# EAGLE board LPS22HB_pcb (EAGLE 8.2.2)
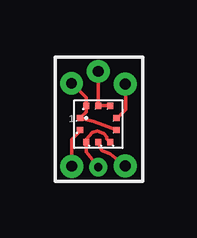
[diagram p0: board, top side]
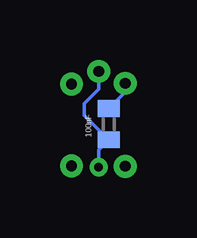
[diagram p1: board, bottom side, seen from below]

No outline drawn. Coordinates in mm, seen from the top.
Copper layers (1*16): Top 0.035mm / dielectric 1.5mm / Bottom 0.035mm
Design rules "default": minimum track width 6mil, minimum drill 0.35mm, track to track 6mil, track to pad 6mil, pad to pad 6mil, via to via 6mil, smd to smd 6mil, copper to edge 40mil, drill to drill 6mil, minimum pad ring 10mil, minimum via ring 8mil, stop-mask expansion 4mil, vias tented up to drill 0mil, thermal gap 10mil

## Footprints (pad centres in the part's own frame; a part is rotated, then mirrored left to right if it is on the bottom)
C0402 = smd 0.7 x 0.9: 1 -0.65,0; 2 0.65,0
LPS22HB_HLGA = smd 0.275 x 0.25: P$1 0.762,-0.25; P$2 0.762,0.25; P$6 -0.762,0.25; P$7 -0.762,-0.25 | smd 0.25 x 0.275: P$3 0.5,0.762; P$4 0,0.762; P$5 -0.5,0.762; P$8 -0.5,-0.762; P$9 0,-0.762; P$10 0.5,-0.762
WIREPAD_0,8/0,45 = drill 0.45 pad 0.71: P$1 0,0

## Placement (x,y rotation side)
C2  100nF  [C0402]  1.48,2.49 270 bottom
U$1  LPS22HB_HLGA  [LPS22HB_HLGA]  1.9,2.5 180 top
U$2  WIREPAD_0,8/0,45  [WIREPAD_0,8/0,45]  0.79,0.74 0 top
U$3  WIREPAD_0,8/0,45  [WIREPAD_0,8/0,45]  3.03,0.75 0 top
U$6  WIREPAD_0,8/0,45  [WIREPAD_0,8/0,45]  3.03,4.17 0 top
U$7  WIREPAD_0,8/0,45  [WIREPAD_0,8/0,45]  1.9,4.7 0 top
U$8  WIREPAD_0,8/0,45  [WIREPAD_0,8/0,45]  0.79,4.2 0 top

## Library data of the parts
C2 = resistor
U$1 = LPS22HB
U$2 U$3 U$6-U$8 = wirepad_08-045

## Nets
+3V3: C2.1 U$1.P$1 U$1.P$6 U$1.P$10 U$8.P$1
GND: C2.2 U$1.P$3 U$1.P$5 U$1.P$8 U$1.P$9 U$7.P$1
N$4: U$1.P$4 U$3.P$1
N$5: U$1.P$2 U$2.P$1
N$6: U$1.P$7 U$6.P$1

## Tracks (layer width: path | path; a pad name or v marks a point on that pad's centre or on a via)
+3V3
  Top 0.152: U$1.P$10 1.4,3.01 1.39,3 | 1.39,3 U$1.P$10 | 1.39,3 U$1.P$1 1.71,2.6 U$1.P$6 | U$1.P$10 1.4,3.6 U$8.P$1
  Bottom 0.152: U$8.P$1 0.79,3.83 C2.1
GND  (via drill 0.35)
  Top 0.152: U$1.P$8 U$1.P$9 U$7.P$1 | v1.9,0.7 1.4,1.34 U$1.P$3 1.4,1.85 1.66,2.15 1.86,2.2 2.12,2.1 2.25,1.97 2.25,1.88 U$1.P$5
  Bottom 0.152: 1.9,4.25 U$7.P$1 1.9,3.96 2.5,3.36 2.5,2.86 C2.2 1.9,1.42 v1.9,0.7
N$4
  Top 0.152: U$3.P$1 2.4,1.25 2.05,1.4 U$1.P$4
N$5
  Top 0.152: U$1.P$2 1.14,2.19 0.8,1.85 0.8,1.35 U$2.P$1
N$6
  Top 0.152: U$1.P$7 2.7,2.75 3.05,3.1 3.05,4.05 U$6.P$1

## Text on the board
bPlace: 100nF